# Altium PCB Motor_Control2.PcbDoc
Units mil, origin at the board's own origin, x right, y up, seen from the top; angles counter-clockwise.
Board outline 4374 x 2970 mil, 2 copper layers (Top Layer, Bottom Layer); 37 components, 27 nets, 129 pads, 33 vias.
Unrouted connection lines stored in the file: 15.
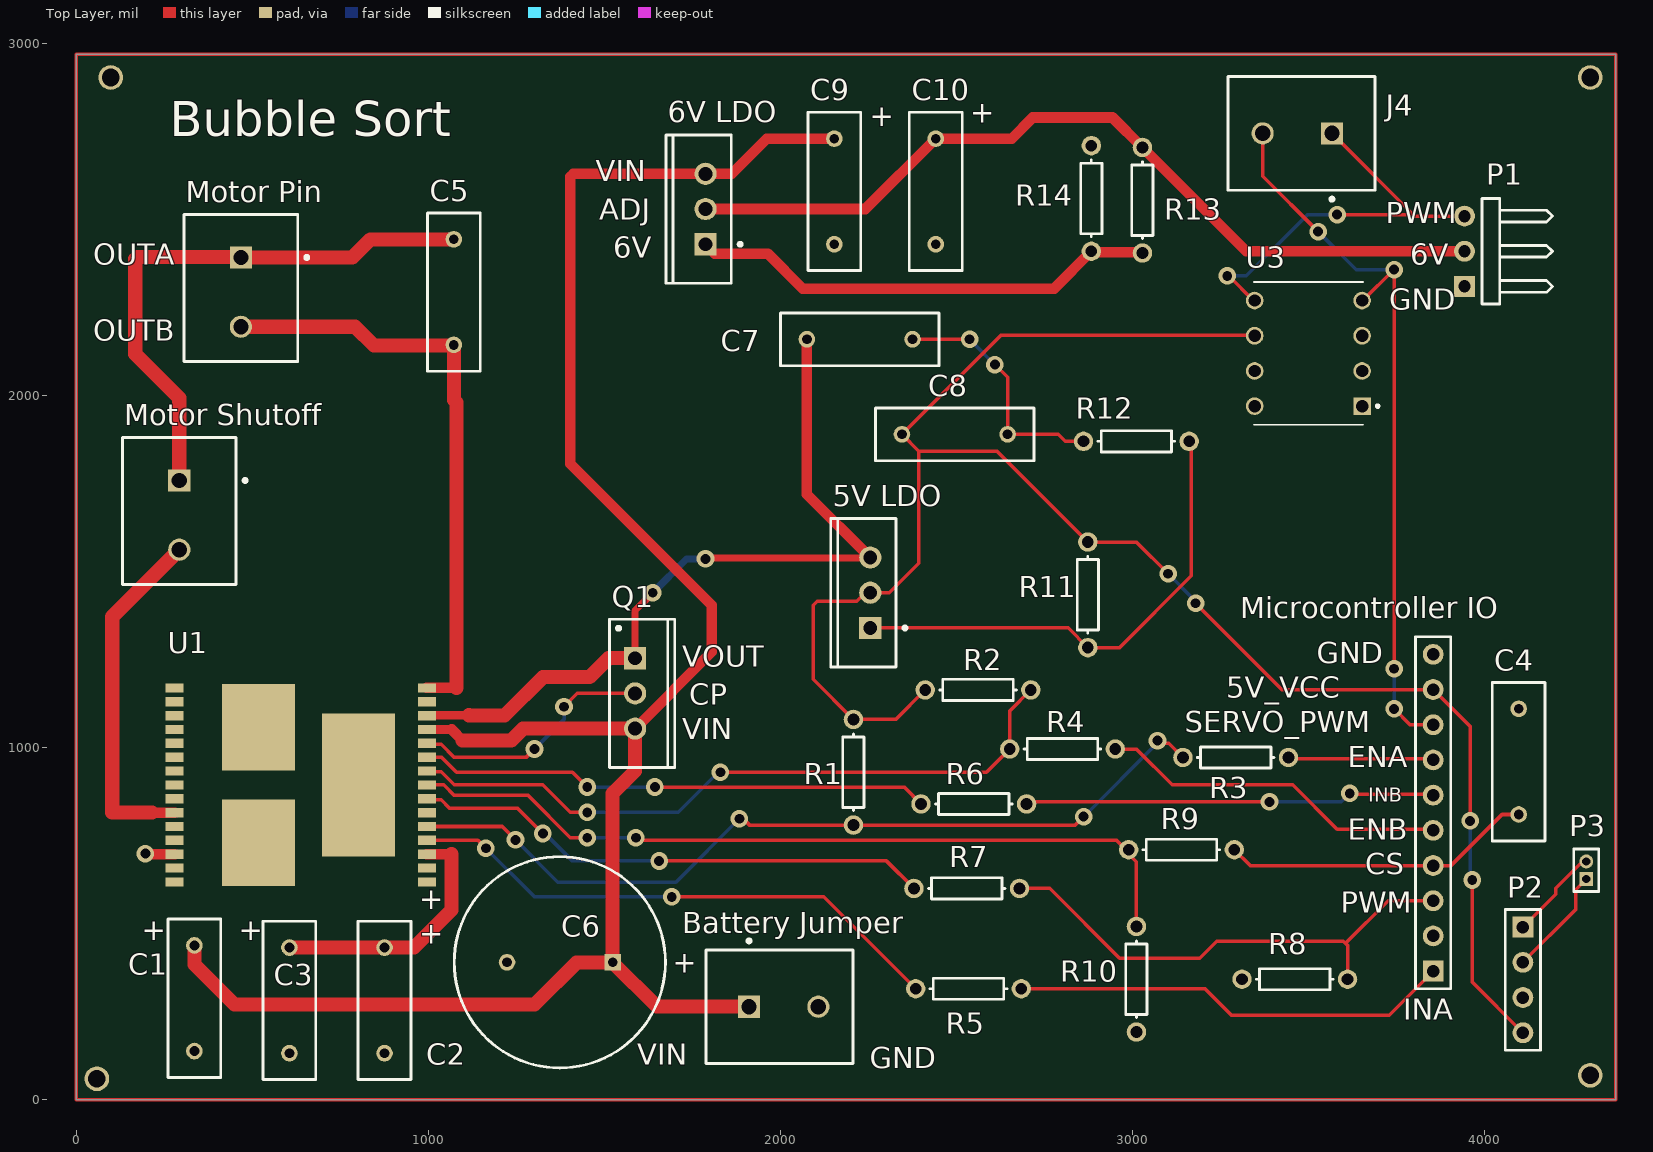
[diagram p0: Top Layer view]
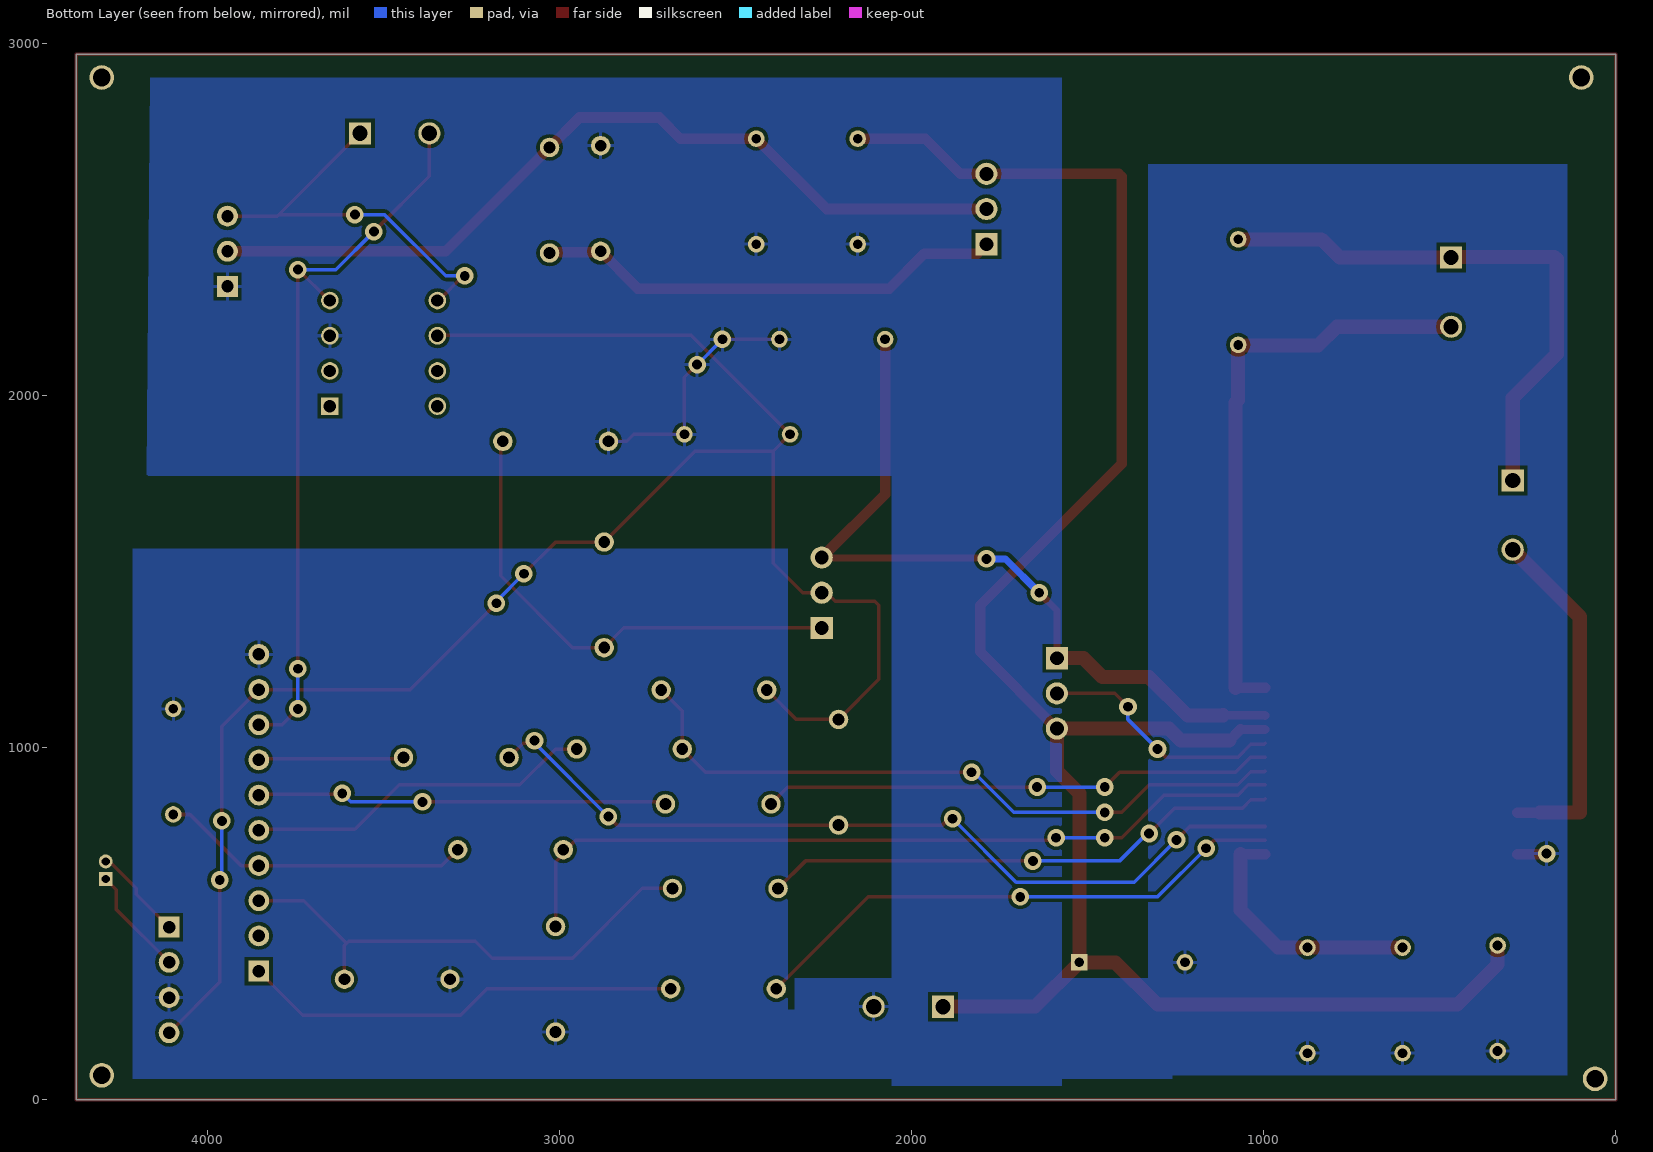
[diagram p1: Bottom Layer view, seen from below]

## Layer stack, top to bottom
Top Solder: solder mask 0.4, Solder Resist, Dk 3.5
Top Layer: signal copper 1.4
Dielectric 1: dielectric 12.6, FR-4, Dk 4.8
Bottom Layer: signal copper 1.4
Bottom Solder: solder mask 0.4, Solder Resist, Dk 3.5

## Board outline
0,0 0,2970 4374,2970 4374,0

## Design rules (kind name [scope] priority, off if disabled: settings)
Clearance [All] p1: gap=10 ignorepadtopadclearanceinfootprint=FALSE
MinimumSolderMaskSliver [All] p1 off: minsoldermaskwidth=10
PolygonConnect [All] p1: connectstyle=Relief reliefconductorwidth=10 reliefentries=4 polygonreliefangle="90 Angle" airgapwidth=10
RoutingVias [All] p1: holewidth=28 width=50 viastyle="Through Hole" minholewidth=28 minwidth=50 maxholewidth=28 maxwidth=50
SilkToSilkClearance [All] p1 off: silktosilkclearance=10
SilkToSolderMaskClearance [IsPad] p1 off: minsilkscreentomaskgap=10 clearancetoexposedcopper=TRUE
SolderMaskExpansion [All] p1 off: expansion=4
UnRoutedNet [All] p1 off:
Width [All] p1: maxlimit=150 minlimit=10 preferedwidth=10 minimp=50.000000 maximp=50.000000 favimp=50.000000
26 further rules are at their usual default settings.

## Components (designator, comment, footprint, x,y, rotation, side; value= is the part's Value field where it differs from the comment)
"5V LDO" "LM1086CT-ADJ/NOPB" NDE0003A 2256,1440 r90 top
"6V LDO" "LM1086CT-ADJ/NOPB" NDE0003A 1788,2530 r90 top
"Battery Jumper" "282836-2" TECO-282836-2_V 2010,264 r0 top
C1 "" RAD-0.3 336,288 r90 top value=0.1uF
C2 "" RAD-0.3 876,282 r90 top value=47uF
C3 "" RAD-0.3 606,282 r90 top value=0.1uF
C4 "" RAD-0.3 4098,960 r270 top value=33nF
C5 "" RAD-0.3 1073,2294 r90 top value=20nF
C6 "Cap Pol1" RB7.6-15 1374,390 r0 top value=750uF
C7 "" RAD-0.3 2226,2160 r180 top value=10uF
C8 "" RAD-0.3 2496,1890 r180 top value=10uF
C9 "" RAD-0.3 2154,2580 r90 top value=10uF
C10 "" RAD-0.3 2442,2580 r90 top value=10uF
J4 "282836-2" TECO-282836-2_V 3469,2745 r180 top
"Microcontroller IO" "HDR1X10" HDR1X10 3855,365 r90 top
"Motor Pin" "282836-2" TECO-282836-2_V 468,2294 r270 top
"Motor Shutoff" "282836-2" TECO-282836-2_V 293,1660.57 r270 top
P1 "Servo Header" HDR1X3H 3944,2310 r90 top
P2 "Bluetooth" HDR1X4 4110,490 r270 top
P3 "MHDR1X2" MHDR1X2 4290,626.69 r90 top
Q1 "MOSFET-N" TO-220AB 1588,1154 r270 top
R1 "" AXIAL-0.3 2208,930 r270 top value=4.7k
R2 "" AXIAL-0.3 2562,1164 r0 top value=4.7k
R3 "" AXIAL-0.3 3294,972 r0 top value=1K
R4 "" AXIAL-0.3 2802,996 r0 top value=1K
R5 "" AXIAL-0.3 2535,315 r180 top value=1K
R6 "" AXIAL-0.3 2550,840 r180 top value=1K
R7 "" AXIAL-0.3 2530,600 r0 top value=1K
R8 "" AXIAL-0.3 3462,342 r180 top value=10k
R9 "" AXIAL-0.3 3140,710 r180 top value=10k
R10 "" AXIAL-0.3 3012,342 r270 top value=1k
R11 "" AXIAL-0.3 2874,1434 r90 top value=121
R12 "" AXIAL-0.3 3011.81,1870.08 r180 top value=363
R13 "" AXIAL-0.3 3029,2555 r90 top value=121
R14 "" AXIAL-0.3 2884,2560 r90 top value=460
U1 "H-Bridge-Motor-Driver" H-Bridge-Motor-Driver 638,894 r90 top
U3 "MCP14E8-E/SN" *DIP775W47P254L1029H508Q8 3500.56,2120 r180 top

## Footprints (in the part's own frame and the unit in brackets; to place one, negate y for a bottom-side part, rotate by r counter-clockwise, add the part's x,y. Pads: shape width x height; smd on the part's side, far side on the other; paste and mask are expansions set on the pad)
*DIP775W47P254L1029H508Q8 [mm]
  rect 1.27x1.27 hole 0.89: 1(-3.875,3.81)
  round 1.27 hole 0.89: 2(-3.875,1.27) 3(-3.875,-1.27) 4(-3.875,-3.81) 5(3.875,-3.81) 6(3.875,-1.27) 7(3.875,1.27) 8(3.875,3.81)
  silkscreen extent -5.09,-5.15 3.94,5.15
AXIAL-0.3 [mm] "Axial Device, Thru-Hole; 2 Leads; 0.3 in Pin Spacing"
  round 1.4 hole 0.85: 1(-3.81,0) 2(3.81,0)
  silkscreen extent -2.77,-0.76 2.77,0.76
H-Bridge-Motor-Driver [mm]
  rect 0.67x1.3 smd: CP(3,-9.1) CS(0,-9.1) CS_DIS(-2,-9.1) ENA/DIAGA(-3,-9.1) ENB/DIAGB(1,-9.1) GNDA(-5,9.1) GNDA(-4,9.1) GNDA(-3,9.1) GNDB(3,9.1) GNDB(4,9.1) GNDB(5,9.1) INA(-4,-9.1) INB(2,-9.1) NC(-6,-9.1) NC(-6,9.1) NC(-1,9.1) NC(1,9.1) NC(6,-9.1) NC(6,9.1) OUTA(-7,-9.1) OUTA(-7,9.1) OUTA(-2,9.1) OUTB(2,9.1) OUTB(7,-9.1) OUTB(7,9.1) PWM(-1,-9.1) VBAT(4,-9.1) VCC(-5,-9.1) VCC(0,9.1) VCC(5,-9.1)
  rect 6.23x5.25 smd: OUTA(-4.165,3.05) OUTB(4.165,3.05)
  rect 10.3x5.25 smd: VCC(0,-4.165)
  body extent -8.6,-8 8.6,8, height 2.35
HDR1X3H [mm] "Connector; Header; 3 Position; Right Angle"
  rect 1.5x1.5 hole 0.9: 1(0,0)
  round 1.5 hole 0.9: 2(2.54,0) 3(5.08,0)
  silkscreen extent -1.27,-6.35 6.35,-1.27
HDR1X4 [mm] "Connector; Header; 4 Position"
  rect 1.5x1.5 hole 0.9: 1(0,0)
  round 1.5 hole 0.9: 2(2.54,0) 3(5.08,0) 4(7.62,0)
  silkscreen extent -1.27,-1.27 8.89,1.27
HDR1X10 [mm] "Connector; Header; 10 Position"
  rect 1.5x1.5 hole 0.9: 1(0,0)
  round 1.5 hole 0.9: 2(2.54,0) 3(5.08,0) 4(7.62,0) 5(10.16,0) 6(12.7,0) 7(15.24,0) 8(17.78,0) 9(20.32,0) 10(22.86,0)
  silkscreen extent -1.27,-1.27 24.13,1.27
MHDR1X2 [mm] "Connector; Header; 2 Position"
  rect 1x1 hole 0.6: 1(0,0)
  round 1 hole 0.6: 2(1.27,0)
  silkscreen extent -0.9,-0.9 2.17,0.9
NDE0003A [mm] "FM, 3-Leads, Body 10.7x4.7mm, Pitch 2.54mm"
  rect 1.6x1.6 hole 1: 1(-2.54,0)
  round 1.6 hole 1: 2(0,0) 3(2.54,0)
  silkscreen extent -5.35,-2.63 5.35,2.85, body extent -5.4,-1.9 5.4,2.9, height 19.4
RAD-0.3 [mm] "Radial Cap, Thru-Hole; 2 Leads; 0.3 in Pin Spacing"
  round 1.2 hole 0.7: 1(-3.81,0) 2(3.81,0)
  silkscreen extent -5.71,-1.91 5.71,1.91
RB7.6-15 [mm] "Polarized Capacitor (Radial); 2 Leads"
  rect 1.2x1.2 hole 0.7: 1(3.81,0)
  round 1.2 hole 0.7: 2(-3.81,0)
  silkscreen extent -7.62,-7.62 7.62,7.62
TECO-282836-2_V [mm] "Female Header, Pitch 5mm, 1 x 2 Position, Height 10mm"
  rect 1.6x1.6 hole 1.1: 1(-2.5,0)
  round 1.6 hole 1.1: 2(2.5,0)
  silkscreen extent -5.6,-4.1 5,4.87, body extent -5.6,-4.1 5,4.1, height 10
TO-220AB [mm] "TO, Thru-Hole, Vertical, Heatsink Mounted; 3 In-Line Leads; Pitch 2.54 mm"
  rect 1.6x1.6 hole 1: 1(-2.54,0)
  round 1.6 hole 1: 2(0,0) 3(2.54,0)
  silkscreen extent -5.35,-1.85 5.35,2.85, body extent -5.4,-1.9 5.4,2.9, height 19.3

## Part data
"5V LDO" "6V LDO": library part CMP-0062-02525-3, "1.5A Low Dropout Positive Regulators, 3-pin TO-220, Pb-Free", Manufacturer="Texas Instruments", PackageTopMarking=NSUZXYTTE#*LM1086*CT-ADJ, PowerWise=N, ComponentLink1Description="Datasheet URL", ComponentLink1URL=http://www.ti.com/general/docs/lit/getliterature.tsp?genericPartNumber=LM1086&fileType=pdf, CompType="LDO IC", PackageDescription="TO-220, Molded, 3 Lead, Straight", PackageReference=NDE0003A, PinCount=3, RoHS=Y
"Battery Jumper" J4 "Motor Pin" "Motor Shutoff": library part CMP-1684-00017-1, "Female Header, Pitch 5 mm, 1 x 2 Position, Height 10 mm, Tail Length 3.5 mm, Rohs, Bulk", Color=Green, Current=13.5A, Manufacturer="TE Connectivity", Package Description="Female Header, Pitch 5 mm, 1 x 2 Position, Height 10 mm, Tail Length 3.5 mm", Package Reference=THD, Standard Package=300, Voltage=300V, 3D Model=282836-2.pdf, Category=Connectors,Interconnects, Clamp Material - Plating=Brass-NickelPlated, Contact Material - Plating=Brass-TinPlated, Datasheet URL=http://www.te.com.cn/commerce/DocumentDelivery/DDEController?Action=showdoc&DocId=Catalog+Section%7F1308389_EUROSTYLE_TERMINAL_BLOCKS%7F0607%7Fpdf%7FEnglish%7FENG_CS_1308389_EUROSTYLE_TERMINAL_BLOCKS_0607.pdf%7F282836-2, Dynamic Catalog=BuchananSeries, Family=TerminalBlocks-WiretoBoard, Featured Product=EurostyleTerminalBlockConnectors, Features=Interlocking(Side), Housing Material=Polyamide(PA66),Nylon6/6, Manufacturer URL=http://www.te.com, Mating Orientation=HorizontalwithBoard, Mounting Type=ThroughHole, Number of Levels=1, Other Names="5ULV-02B / A98076", Packaging=Bulk, Pitch="0.197\"(5.00mm)", Positions Per Level=2, Product Training Modules=Wire-to-BoardEurostyleTerminalBlocks, RoHS Information=282836-2StatementofCompliance, Screw Material - Plating=Brass-NickelPlated, Screw Thread=M3, Series=Buchanan, Torque - Screw=0.68Nm(6Lb-In), Wire Gauge=16-30AWG, Wire Termination=Screw-RisingCageClamp
C1 C2 C3 C4 C5 C7 C8 C9 C10: library part Cap, "Capacitor", LatestRevisionDate=17-Jul-2002, LatestRevisionNote="Re-released for DXP Platform.", PackageDescription="Radial Cap, Thru-Hole; 2 Leads; 0.3 in Pin Spacing", PackageReference=RAD-0.3, Published=8-Jun-2000, Publisher="Altium Limited"
C6: "Polarized Capacitor (Radial)", LatestRevisionDate=17-Jul-2002, LatestRevisionNote="Re-released for DXP Platform.", PackageDescription="Polarized Capacitor (Radial); 2 Leads", PackageReference=RB7.6-15, Published=8-Jun-2000, Publisher="Altium Limited"
"Microcontroller IO": library part "Header 10", "Header, 10-Pin", LatestRevisionDate=17-Jul-2002, LatestRevisionNote="Re-released for DXP Platform.", Publisher="Altium Limited"
P1: library part "Header 3H", "Header, 3-Pin, Right Angle", LatestRevisionDate=17-Jul-2002, LatestRevisionNote="Re-released for DXP Platform.", Publisher="Altium Limited"
P2: library part "Header 4", "Header, 4-Pin", LatestRevisionDate=17-Jul-2002, LatestRevisionNote="Re-released for DXP Platform.", Publisher="Altium Limited"
P3: "Header, 2-Pin", LatestRevisionDate=17-Jul-2002, LatestRevisionNote="Re-released for DXP Platform.", Publisher="Altium Limited"
Q1: library part NMOS-2, "N-Channel Power MOSFET", ComponentLink1Description="Manufacturer Link", ComponentLink1URL=http://www.irf.com/, DatasheetVersion=PD-9.814, LatestRevisionDate=17-Jul-2002, LatestRevisionNote="Re-released for DXP Platform.", Note="Pin 2 is electrically connected to pin 4.", PackageDescription="TO, Thru-Hole, Vertical, Heatsink Mounted; 3 In-Line Leads; Pitch 2.54 mm", PackageReference=TO-220AB, PackageVersion=Feb-1997, Published=8-Jun-2000, Publisher="Altium Limited"
R1 R2 R3 R4 R5 R6 R7 R8 R9 R10 R11 R12 R13 R14: library part Res1, "Resistor", LatestRevisionDate=17-Jul-2002, LatestRevisionNote="Re-released for DXP Platform.", PackageDescription="Axial Device, Thru-Hole; 2 Leads; 0.3 in Pin Spacing", PackageReference=AXIAL-0.3, Published=8-Jun-2000, Publisher="Altium Limited"
U1: "The VHN5019A-E is a full bridge motor driver / intended for a wide range of automotive / applications. The device incorporates a dual / monolithic high-side drivers and two low-side / switches."
U3: library part MAX4427MJA, "MOSFET DRVR 1.5A 2-OUT Lo Side Non-Inv 8-Pin CDIP N", Package="CDIP-8 Maxim", Availability=Unavailable, MF="Maxim Integrated", MP=MAX4427MJA, Price=None, SnapEDA_Link=https://www.snapeda.com/parts/MAX4427MJA/Maxim%20Integrated/view-part/?ref=snap

## Free pads (board coordinates)
  round 70 hole 50: 2(59.06,59.06) 2(98.43,2903.54) 2(4301.18,68.9) 2(4301.18,2903.54)

## Via types
v1: diameter 50, hole 28, Top Layer to Bottom Layer, 33 vias

## Nets (pads, with @x,y where several pads share a name; then routed paths per layer and width w, separated by ;. In a path a pad name is that pad's centre, name@x,y a point inside that pad or via, vN(x,y) a via of type N, cw(c..) or ccw(c..) an arc to the next point about the centre after c; other vN are vias at no path point)
5V_VCC: "5V LDO.2" "Microcontroller IO.9" C8.2 P2.4 R1.1 R2.1 R11.2 U3.6 | length 5290.9
  Top Layer w10: R2.1 2328,1080 R1.1 2094,1194 2094,1404.14 2105.58,1415.72 2217.38,1415.72 2241.66,1440 2256,1440 2310,1440 2394,1524 2394,1842 ; v1(3102,1494) 3012,1584 R11.2 2616,1842 2394,1842 ; v1(3180,1410) 3425,1165 3855,1165 3960,1060 v1(3960,792) ; U3.6 3346,2172 2628,2172 C8.2 2394,1842 ; v1(3966,624) 3966,334 P2.4
  Bottom Layer w10: v1(3102,1494) 3180,1416 v1(3180,1410) ; v1(3960,792) 3960,630 v1(3966,624)
CP: Q1.2 U1.CP | length 704.8
  Top Layer w10: U1.CP 999.24,1009.14 1036.86,1009.14 1074,972 1278,972 v1(1302,996) ; v1(1386,1116) 1424,1154 Q1.2
  Bottom Layer w10: v1(1302,996) 1386,1080 v1(1386,1116)
CS: R9.2 R10.1 U1.CS | length 2297.1
  Top Layer w10: U1.CS 1044.33,894 1074.33,864 1284,864 1404,744 v1(1452,744) ; v1(1590,744) 1596.56,737.44 2955.06,737.44 2982.51,710 R9.2 2990,697.79 3012,675.79 R10.1
  Bottom Layer w10: v1(1452,744) v1(1590,744)
ENA: "Microcontroller IO.7" R3.2 | length 413.9
  Top Layer w10: R3.2 3447.5,968.5 3851.5,968.5 3855,965
ENB: "Microcontroller IO.5" R4.2 | length 998.7
  Top Layer w10: R4.2 3012,996 3114,894 3456,894 3582,768 3852,768 3855,765
GND: "Battery Jumper.2" "Microcontroller IO.10" C1.1 C2.1 C3.1 C4.1 C6.2 C7.1 C8.1 C9.1 C10.1 P1.1 P2.3 pad.2@4301.18,68.9 R8.2 R10.2 R12.2 R14.2 U1.GNDA U1.GNDB U3.3 | length 784.4
  Top Layer w10: v1(196.85,698.82) v1@198.52,697.15 ; C7.1 v1(2538,2160) ; v1(2610,2088) 2646,2052 C8.1 2790,1890 2809.92,1870.08 R12.2
  Top Layer w30: v1@198.52,697.15 U1.GNDA@279.73,697.15
  Bottom Layer w10: v1(2538,2160) v1(2610,2088)
INA: "Microcontroller IO.1" R5.1 | length 1252.8
  Top Layer w10: R5.1 3207,315 3282,240 3730,240 3855,365
INB: "Microcontroller IO.6" R6.1 | length 1169.5
  Top Layer w10: R6.1 2706,846 v1(3390,846) ; v1(3618,870) 3620.5,867.5 3852.5,867.5 3855,865
  Bottom Layer w10: v1(3390,846) 3594,846 v1(3618,870)
INTA: "Motor Shutoff.2" U1.OUTA | length 1002.9
  Top Layer w30: 216,815.26 U1.OUTA@279.73,815.26
  Top Layer w40: 216,815.26 102.6,815.26 102.6,1371.75 293,1562.15
"Net5V LDO_1": "5V LDO.1" R11.1 R12.1 | length 1404.3
  Top Layer w10: 2256,1340 2818,1340 R11.1 2964,1284 3168,1488 3168,1863.89 R12.1
"Net6V LDO_1": "6V LDO.1" R13.1 R14.1 | length 1339.2
  Top Layer w10: 1788,2430 1814.5,2403.5 ; R14.1 R14.1@2886.5,2407.5 ; R13.1@3026.5,2407.5 R13.1
  Top Layer w30: 1814.5,2403.5 1964.5,2403.5 2064,2304 2778,2304 R14.1 ; R14.1@2886.5,2407.5 R13.1@3026.5,2407.5
"Net6V LDO_2": "6V LDO.2" C10.2 P1.2 R13.2 | length 2421.1
  Top Layer w30: 1788,2530 2242,2530 C10.2 2658,2730 2718,2790 2944,2790 R13.2 3324,2410 P1.2
NetC4_2: "Microcontroller IO.4" C4.2 R9.1 | length 886.7
  Top Layer w10: R9.1 3335,665 3855,665 3905.6,665 4050.6,810 C4.2
NetJ4_1: J4.1 P1.3 U3.5 | length 1181.4
  Top Layer w10: v1(3270,2340) 3274,2340 3344,2270 U3.5 ; J4.1 3798.43,2514 ; v1(3582,2514) 3798.43,2514 ; P1.3 3802.43,2510 3798.43,2514
  Bottom Layer w10: v1(3270,2340) 3324,2340 3498,2514 v1(3582,2514)
NetR1_2: R1.2 R3.1 U1.ENA/DIAGA | length 2418
  Top Layer w10: U1.ENA/DIAGA 1210.11,775.89 v1(1248,738) ; v1(1884,798) 1894.82,798 1912.82,780 R1.2 2838,780 v1(2862,804) ; v1(3072,1020) 3079.65,1012.35 3103.65,1012.35 R3.1
  Bottom Layer w10: v1(1248,738) 1368,618 1704,618 v1(1884,798) ; v1(2862,804) 3072,1014 v1(3072,1020)
NetR2_2: R2.2 R4.1 U1.ENB/DIAGB | length 1971.8
  Top Layer w10: U1.ENB/DIAGB 998.5,931.14 1036.86,931.14 1074,894 1326,894 1404,816 v1(1452,816) ; v1(1830,930) 2586,930 R4.1 2652,1104 R2.2
  Bottom Layer w10: v1(1452,816) 1710,816 1824,930 v1(1830,930)
NetR5_2: R5.2 U1.INA | length 1563.3
  Top Layer w10: U1.INA 1141.48,736.52 v1(1164,714) ; v1(1692,576) 2124,576 R5.2
  Bottom Layer w10: v1(1164,714) 1302,576 v1(1692,576)
NetR6_2: R6.2 U1.INB | length 1458.7
  Top Layer w10: U1.INB 1037.96,972.74 1080.7,930 1410,930 v1(1452,888) ; v1(1644,888) 2352,888 R6.2
  Bottom Layer w10: v1(1452,888) v1(1644,888)
NetR7_1: R7.1 U1.PWM | length 1489.2
  Top Layer w10: U1.PWM 999.11,851.79 1036.86,851.79 1060.65,828 1254,828 v1(1326,756) ; v1(1656,678) 2302,678 R7.1
  Bottom Layer w10: v1(1326,756) 1332,756 1410,678 v1(1656,678)
OUTA: "Motor Pin.1" "Motor Shutoff.1" C5.2 | length 1610.4
  Top Layer w10: 168,2388.14 173.86,2394 ; 466.43,2394 468,2392.43
  Top Layer w40: 168,2388.14 168,2118 293,1993 293,1759 ; 173.86,2394 466.43,2394 ; 468,2392.43 784.43,2392.43 836,2444 C5.2
OUTB: "Motor Pin.2" C5.1 U1.OUTB | length 1688.8
  Top Layer w10: C5.1@1071,2142 C5.1 ; 1079.59,1169.59 1080,1170
  Top Layer w30: U1.OUTB@996.27,1169.59 1079.59,1169.59
  Top Layer w40: 468,2195.57 792.43,2195.57 846,2142 C5.1@1071,2142 ; C5.1 1073,1987 1080,1980 1080,1170
PWM: "Microcontroller IO.3" R7.2 R8.1 | length 1434
  Top Layer w10: R7.2 2766,600 2964,402 3192,402 3240,450 3600,450 3606,444 ; R8.1 3612,438 3606,444 ; 3855,565 3727,565 3606,444
RXD: P2.1 P3.2 | length 295.7
  Top Layer w10: P2.1@4130,470 P2.1 4203.63,583.63 4203.63,600.9 4273.8,671.07 4284.38,671.07 P3.2
SERVO_PWM: "Microcontroller IO.8" J4.2 U3.4 | length 2109.9
  Top Layer w10: J4.2 3370.57,2623.43 v1(3528,2466) ; U3.4 3654.56,2270 3742.56,2358 v1(3744,2358) v1(3744,1224) ; v1(3744,1110) 3789,1065 3855,1065
  Bottom Layer w10: v1(3528,2466) 3636,2358 v1(3744,2358) ; v1(3744,1110) v1(3744,1224)
TXD: P2.2 P3.1 | length 311.3
  Top Layer w10: P2.2 4260,540 4260,596.69 P3.1
VIN: "6V LDO.3" "Battery Jumper.1" C1.2 C6.1 C9.2 Q1.3 U1.VBAT | length 5707.7
  Top Layer w10: 1404,2622.14 1411.86,2630
  Top Layer w25: U1.VBAT 1066.52,1051.48
  Top Layer w30: 1066.52,1051.48 1098,1020 ; 1404,2622.14 1404,1806 1806,1404 1806,1272 Q1.3 ; 1411.86,2630 1788,2630 1862,2630 1962,2730 C9.2
  Top Layer w40: C1.2 336,384 450,270 1302,270 1422,390 C6.1 ; 1098,1020 1236,1020 1270,1054 Q1.3 1588,934 1524,870 C6.1 ; 1911.57,264 1650,264 C6.1
VOUT: "5V LDO.3" C2.2 C3.2 C7.2 Q1.1 U1.VCC | length 2954
  Top Layer w10: v1(1788,1536) v1@1790,1538 ; 2254,1538 2256,1540
  Top Layer w20: Q1.1 1588,1390 v1(1638,1440) ; v1@1790,1538 2254,1538
  Top Layer w25: U1.VCC@996.27,1090.85 1116,1092
  Top Layer w30: U1.VCC@996.27,697.15 1066.85,697.15 ; C7.2 2076,1720 2256,1540
  Top Layer w40: C3.2 C2.2 960,432 1066.85,538.85 1066.85,697.15 ; 1116,1092 1216.76,1090.85 1325.91,1200 1458,1200 1512,1254 Q1.1
  Bottom Layer w20: v1(1638,1440) 1734,1536 v1(1788,1536)
pads on no net: "Microcontroller IO.2" U1.CS_DIS U1.NC U3.1 U3.2 U3.7 U3.8
copper on no net: | length 14688
  Top Layer w10: 0,0 1968,0 4374,0 4374,408 4374,2970 90,2970 0,2970 0,2136 0,0

## Polygon pours and split planes (outlines as drawn)
GND on Bottom Layer (solid, pour order 4): 4173.23,1771.65 1574.8,1771.65 1574.8,2903.54 4153.54,2903.54 4163.39,2903.54
GND on Bottom Layer (solid, pour order 0): 1328.74,68.9 1328.74,2657.48 137.8,2657.48 137.8,68.9
GND on Bottom Layer (solid, pour order 14): 2381.89,59.06 1259.84,59.06 1259.84,344.49 2332.68,344.49 2332.68,255.91 2372.05,255.91
GND on Bottom Layer (solid, pour order 12): 1574.8,1820.87 2057.09,1820.87 2057.09,39.37 1574.8,39.37
no net on Bottom Layer (solid, pour order 10): 1624.02,1771.65
no net on Bottom Layer (solid, pour order 6): 4158.46,2908.46
GND on Bottom Layer (solid, pour order 2): 4212.6,59.06 4212.6,1564.96 2352.36,1564.96 2352.36,59.06

## Silkscreen, mask and mechanical layers (free items; w line width, h text height)
Top Overlay:
  text "+" at 2539.37,2775.59 h60
  text "+" at 2253.94,2765.75 h60
  text "Bubble Sort" at 265.75,2736.22 h100
  text "VIN" at 1476.38,2608.27 h60
  text "ADJ" at 1486.22,2500 h60
  text "PWM" at 3720.47,2490.16 h60
  text "6V" at 1525.59,2391.73 h60
  text "OUTA" at 49.21,2372.05 h60
  text "6V" at 3789.37,2372.05 h60
  text "GND" at 3730.31,2244.09 h60
  text "OUTB" at 49.21,2155.51 h60
  text "GND" at 3523.62,1240.16 h60
  text "VOUT" at 1722.44,1230.32 h60
  text "5V_VCC" at 3267.72,1141.73 h60
  text "CP" at 1742.13,1122.05 h60
  text "SERVO_PWM" at 3149.61,1043.31 h60
  text "VIN" at 1722.44,1023.62 h60
  text "ENA" at 3612.2,944.88 h60
  text "INB" at 3671.26,846.46 h40
  text "ENB" at 3612.2,738.19 h60
  text "CS" at 3661.42,639.76 h60
  text "+" at 974.41,541.34 h60
  text "PWM" at 3592.52,531.5 h60
  text "+" at 187.01,452.76 h60
  text "+" at 462.6,452.76 h60
  text "+" at 974.41,442.91 h60
  text "INA" at 3769.69,226.38 h60
  text "VIN" at 1594.49,98.43 h60
  text "GND" at 2253.94,88.58 h60

## Text inside footprints (layer, text, board x,y; h text height)
C6: Top Overlay "+" at 1694.15,360.99 h59.06